# EAGLE board gainer_v1 (EAGLE 4.16)
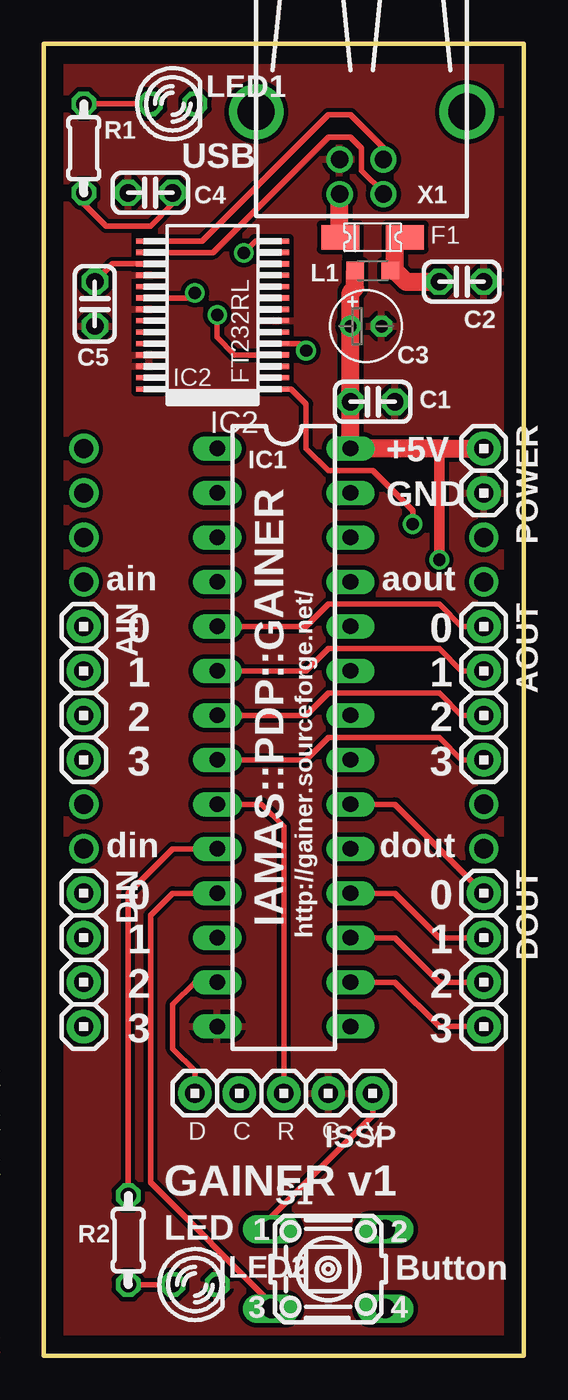
[diagram p0: board, top side]
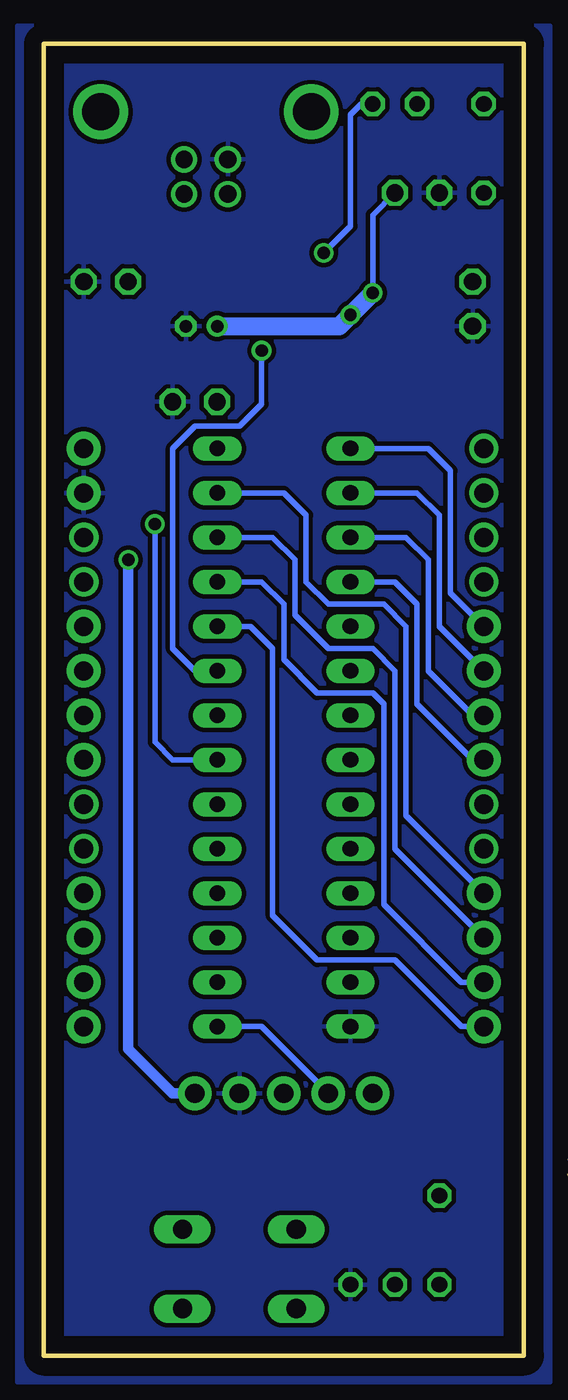
[diagram p1: board, bottom side, seen from below]

Size 27.43 x 74.93 mm. Coordinates in mm from the lower left corner, seen from the top.
Outline: 0,0 0,74.93 27.43,74.93 27.43,0 0,0
Copper layers (1*16): Top 0.035mm / dielectric 1.5mm / Bottom 0.035mm
Design rules "10mils": minimum track width 10mil, minimum drill 28mil, track to track 10mil, track to pad 10mil, pad to pad 10mil, via to via 10mil, smd to smd 10mil, copper to edge 40mil, drill to drill 10mil, minimum pad ring 10mil, minimum via ring 8mil, stop-mask expansion 0mil, vias tented up to drill 0mil, thermal gap 10mil
Net classes: 1 +5v: width 0.813 mm; 2 GND: width 0.813 mm

## Footprints (pad centres in the part's own frame; a part is rotated, then mirrored left to right if it is on the bottom)
1X04 = drill 1.092 pad 1.93 round: 1 -3.81,0; 2 -1.27,0; 3 1.27,0; 4 3.81,0
C025-024X044 = drill 0.991 octagon: 1 -1.27,0; 2 1.27,0
E1,8-4 = drill 0.711 pad 1.168 round: + -0.889,0 | drill 0.711 pad 1.168 octagon: - 0.889,0
1206L = smd 2.16 x 1.4: P$1 -1.85,0; P$2 1.85,0
PDIP28 = drill 0.889 long: 1 -16.51,-3.81; 2 -13.97,-3.81; 3 -11.43,-3.81; 4 -8.89,-3.81; 5 -6.35,-3.81; 6 -3.81,-3.81; 7 -1.27,-3.81; 8 1.27,-3.81; 9 3.81,-3.81; 10 6.35,-3.81; 11 8.89,-3.81; 12 11.43,-3.81; 13 13.97,-3.81; 14 16.51,-3.81; 15 16.51,3.81; 16 13.97,3.81; 17 11.43,3.81; 18 8.89,3.81; 19 6.35,3.81; 20 3.81,3.81; 21 1.27,3.81; 22 -1.27,3.81; 23 -3.81,3.81; 24 -6.35,3.81; 25 -8.89,3.81; 26 -11.43,3.81; 27 -13.97,3.81; 28 -16.51,3.81
SSOP-28 = smd 0.3 x 1.5: 1 -4.225,-3.625; 2 -3.575,-3.625; 3 -2.925,-3.625; 4 -2.275,-3.625; 5 -1.625,-3.625; 6 -0.975,-3.625; 7 -0.325,-3.625; 8 0.325,-3.625; 9 0.975,-3.625; 10 1.625,-3.625; 11 2.275,-3.625; 12 2.925,-3.625; 13 3.575,-3.625; 14 4.225,-3.625; 15 4.225,3.625; 16 3.575,3.625; 17 2.925,3.625; 18 2.275,3.625; 19 1.625,3.625; 20 0.975,3.625; 21 0.325,3.625; 22 -0.325,3.625; 23 -0.975,3.625; 24 -1.625,3.625; 25 -2.275,3.625; 26 -2.925,3.625; 27 -3.575,3.625; 28 -4.225,3.625
1X05 = drill 1.092 pad 1.93 round: 1 -5.08,0; 2 -2.54,0; 3 0,0; 4 2.54,0; 5 5.08,0
L2012C = smd 1 x 1: 1 -1,0; 2 1,0
LED3MM = drill 0.889 octagon: A -1.27,0; K 1.27,0
1X02 = drill 1.092 pad 1.93 round: 1 -1.27,0; 2 1.27,0
0204/5 = drill 0.889 octagon: 1 -2.54,0; 2 2.54,0
B3F-10XX = drill 1.092 long: 1 -3.251,2.261; 2 3.251,2.261; 3 -3.251,-2.261; 4 3.251,-2.261
USB-B-H = drill 0.991 round: D+ 0,1.25; D- 1.981,1.25; GND 0,-1.25; VBUS 1.981,-1.25 | drill 2.108 round: P$1 -2.718,-6.02; P$2 -2.718,6.02

## Placement (x,y rotation side)
AIN  [1X04]  2.29,37.85 270 top
AOUT  [1X04]  25.15,37.85 270 top
C1  [C025-024X044]  18.8,54.48 0 top
C2  10000p  [C025-024X044]  23.88,61.34 0 top
C3  10u  [E1,8-4]  18.41,58.8 0 top
C4  0.1u  [C025-024X044]  6.1,66.42 180 top
C5  0.1u  [C025-024X044]  2.92,60.07 270 top
DIN  [1X04]  2.29,22.61 270 top
DOUT  [1X04]  25.15,22.61 270 top
F1  1206L  [1206L]  18.8,63.88 180 top
IC1  CY8C29466-24PDIP  [PDIP28]  13.72,35.31 270 top
IC2  FT232RL  [SSOP-28]  9.65,59.44 90 top
ISSP  [1X05]  13.72,14.99 180 top
L1  [L2012C]  18.8,61.98 0 top
LED1  [LED3MM]  7.37,71.5 0 top
LED2  [LED3MM]  8.64,4.06 0 top
POWER  [1X02]  25.15,50.55 270 top
R1  [0204/5]  2.29,68.96 270 top
R2  [0204/5]  4.83,6.6 90 top
S1  [B3F-10XX]  16.26,4.95 0 top
X1  USB-B-H  [USB-B-H]  18.16,68.33 270 top

## Library data of the parts
AIN AOUT DIN DOUT ISSP POWER = pinhead-small
C1-C5 L1 R1 R2 = rcl
F1 = ptc-littlefuse
IC1 = cypress-psoc
IC2 = ftdi
LED1 LED2 = led
S1 = switch-omron
X1 = con-usb

## Nets
+5V: C1.1 C3.+ C4.1 IC1.28 IC2.4 IC2.20 ISSP.1 L1.1 POWER.1 R1.2 S1.1
AIN1: AIN.1 IC1.1
AIN2: AIN.2 IC1.2
AIN3: AIN.3 IC1.3
AIN4: AIN.4 IC1.4
AOUT1: AOUT.1 IC1.5
AOUT2: AOUT.2 IC1.6
AOUT3: AOUT.3 IC1.7
AOUT4: AOUT.4 IC1.8
DIN1: DIN.1 IC1.27
DIN2: DIN.2 IC1.26
DIN3: DIN.3 IC1.25
DIN4: DIN.4 IC1.24
DOUT1: DOUT.1 IC1.20
DOUT2: DOUT.2 IC1.18
DOUT3: DOUT.3 IC1.17
DOUT4: DOUT.4 IC1.16
GND: C1.2 C2.2 C3.- C4.2 C5.2 IC1.14 IC2.7 IC2.18 IC2.21 IC2.25 IC2.26 ISSP.2 LED2.K POWER.2 X1.GND
N$1: LED1.A R1.1
N$2: IC2.14 LED1.K
N$3: IC2.16 X1.D-
N$4: IC1.21 IC2.1
N$5: IC1.23 IC2.5
N$6: IC2.15 X1.D+
N$8: IC1.11 S1.3
N$9: IC1.10 R2.2
N$10: LED2.A R2.1
N$11 [+5v]: F1.P$2 X1.VBUS
N$12: IC1.9 ISSP.3
N$13 [+5v]: C2.1 F1.P$1 L1.2
N$14: IC1.15 ISSP.4
N$15: IC1.13 ISSP.5
N$17: C5.1 IC2.17

## Tracks (layer width: path | path; a pad name or v marks a point on that pad's centre or on a via)
+5V  (via drill 0.71)
  Top 0.305: S1.1 13.01,7.93 18.8,13.72 ISSP.1 | IC2.20 8.34,60.41 v8.64,60.71 | C4.1 7.37,65.79 6.1,64.52 3.56,64.52 2.29,65.79 R1.2 | IC2.4 10.91,57.16 9.91,58.17 v9.91,59.44
  Top 0.61: v22.61,45.47 22.61,51.82
  Top 1.016: L1.1 17.8,60.98 17.53,60.71 C3.+ C1.1 IC1.28 22.61,51.82 POWER.1
  Bottom 0.305: v8.64,60.71 8.64,65.15 C4.1
  Bottom 0.61: ISSP.1 20.07,14.99 22.61,17.53 v22.61,45.47
  Bottom 1.016: C3.+ 10.54,58.8 v9.91,59.44 v8.64,60.71
AIN1
  Bottom 0.305: AIN.1 4.19,43.56 4.19,50.55 5.46,51.82 IC1.1
AIN2
  Bottom 0.305: AIN.2 4.83,41.66 4.83,48.01 6.1,49.28 IC1.2
AIN3
  Bottom 0.305: 2.92,36.58 5.46,39.12 5.46,45.47 6.73,46.74 IC1.3
  Bottom 0.406: AIN.3 2.92,36.58
AIN4
  Bottom 0.305: 2.92,34.04 6.1,37.21 6.1,42.93 7.37,44.2 IC1.4
  Bottom 0.406: AIN.4 2.92,34.04
AOUT1
  Top 0.305: IC1.5 14.99,41.66 16.26,42.93 22.61,42.93 23.88,41.66 AOUT.1
AOUT2
  Top 0.305: IC1.6 14.99,39.12 16.26,40.39 22.61,40.39 23.88,39.12 AOUT.2
AOUT3
  Top 0.305: IC1.7 14.99,36.58 16.26,37.85 22.61,37.85 23.88,36.58 AOUT.3
AOUT4
  Top 0.305: IC1.8 14.99,34.04 16.26,35.31 22.61,35.31 23.88,34.04 AOUT.4
DIN1
  Bottom 0.305: DIN.1 6.73,30.86 6.73,41.66 8,42.93 11.18,42.93 12.45,44.2 12.45,48.01 13.72,49.28 IC1.27
DIN2
  Bottom 0.305: DIN.2 7.37,28.96 7.37,39.12 8.64,40.39 11.18,40.39 13.08,42.29 13.08,45.47 14.35,46.74 IC1.26
DIN3
  Bottom 0.305: DIN.3 3.56,21.34 8,25.78 8,37.21 8.64,37.85 11.81,37.85 13.72,39.75 13.72,42.93 14.99,44.2 IC1.25
DIN4
  Bottom 0.305: DIN.4 3.56,18.8 7.37,22.61 11.81,22.61 14.35,25.15 14.35,40.39 15.62,41.66 IC1.24
DOUT1
  Top 0.305: IC1.20 20.07,31.5 DOUT.1
DOUT2
  Top 0.305: IC1.18 20.07,26.42 22.61,23.88 DOUT.2
DOUT3
  Top 0.305: IC1.17 20.07,23.88 22.61,21.34 DOUT.3
DOUT4
  Top 0.305: IC1.16 20.07,21.34 22.61,18.8 DOUT.4
GND
  pour Bottom (isolate 0.254): -1.52,75.95 28.96,75.95 28.96,-1.52 -1.52,-1.52
  pour Top: -2.79,77.22 30.23,77.22 30.23,-2.79 -2.79,-2.79
N$1
  Top 0.305: R1.1 LED1.A
N$2  (via drill 0.71)
  Top 0.305: IC2.14 12.1,63.66 v11.43,62.99
  Bottom 0.305: LED1.K 9.27,71.5 9.91,70.87 9.91,64.52 v11.43,62.99
N$3
  Top 0.305: IC2.16 9.67,63.01 16.26,69.6 17.53,69.6 18.16,68.96 18.16,67.69 19.43,66.42 19.41,66.4 X1.D-
N$4  (via drill 0.71)
  Top 0.305: IC2.1 14.13,55.21 14.99,54.36 14.99,51.82 16.26,50.55 18.8,50.55 21.08,48.26 v21.08,47.5
  Bottom 0.305: IC1.21 20.07,34.04 21.08,35.05 v21.08,47.5
N$5  (via drill 0.71)
  Top 0.305: IC2.5 14.58,57.81 v14.99,57.4
  Bottom 0.305: IC1.23 18.8,39.12 20.07,40.39 20.07,51.82 18.8,53.09 16.26,53.09 14.99,54.36 v14.99,57.4
N$6
  Top 0.305: IC2.15 9.05,63.66 16.26,70.87 17.53,70.87 19.43,68.96 19.43,68.33 X1.D+
N$7  (via drill 1.09 pad 1.68)
  other vias: 2.29,28.96
N$8
  Top 0.305: IC1.11 7.37,26.42 6.1,25.15 6.1,9.91 13.08,2.92 13.01,2.85 S1.3
N$9
  Top 0.305: IC1.10 7.37,28.96 4.83,26.42 R2.2
N$10
  Top 0.305: LED2.A 7.37,3.56 6.86,4.06 R2.1
N$11
  Top 1.016: F1.P$2 16.89,63.88 16.91,63.9 X1.VBUS
N$12
  Top 0.305: IC1.9 12.45,31.5 13.72,30.23 ISSP.3
N$13
  Top 1.016: L1.2 20.07,61.98 | 20.7,63.88 F1.P$1 20.07,63.88 20.07,61.98 | 20.07,61.98 20.7,61.34 C2.1
N$14
  Bottom 0.305: IC1.15 14.99,18.8 ISSP.4
N$15
  Top 0.305: IC1.13 8.64,21.34 7.37,20.07 7.37,17.53 8.64,16.26 ISSP.5
N$16  (via drill 1.09 pad 1.68)
  other vias: 2.29,31.5
N$17
  Top 0.305: IC2.17 3.94,62.36 C5.1
N$18  (via drill 1.09 pad 1.68)
  other vias: 2.29,44.2
N$19  (via drill 1.09 pad 1.68)
  other vias: 25.15,28.96
N$20  (via drill 1.09 pad 1.68)
  other vias: 25.15,31.5
N$21  (via drill 1.09 pad 1.68)
  other vias: 2.29,49.28
N$22  (via drill 1.09 pad 1.68)
  other vias: 2.29,51.82
N$23  (via drill 1.09 pad 1.68)
  other vias: 25.15,44.2
N$24  (via drill 1.09 pad 1.68)
  other vias: 25.15,46.74
N$27  (via drill 1.09 pad 1.68)
  other vias: 2.29,46.74

## Text on the board
Top: ABC
Bottom: ABC
Pads: ABC
Vias: ABC
Dimension: ABC
tPlace: USB | F1 | IC2 | +5V | GND | ain | aout | 0 | 0 | 1 | 1 | 2 | 2 | 3 | 3 | din | dout | 0 | 0 | 1 | IAMAS::PDP::GAINER | 1 | http://gainer.sourceforge.net/ | 2 | 2 | 3 | 3 | ABC | D | C | R | G | V | LED | Button
tNames: ABC | GAINER v1
tStop: ABC
bStop: ABC